# Altium PCB kam_rx.PcbDoc
Units mm, origin at the board's own origin, x right, y up, seen from the top; angles counter-clockwise.
Board outline 152.4 x 101.6 mm, 4 copper layers (Top Layer, int1, int2, Bottom Layer), stack 0.707 mm thick; 77 components, 77 nets, 338 pads, 225 vias.
Unrouted connection lines stored in the file: 1.
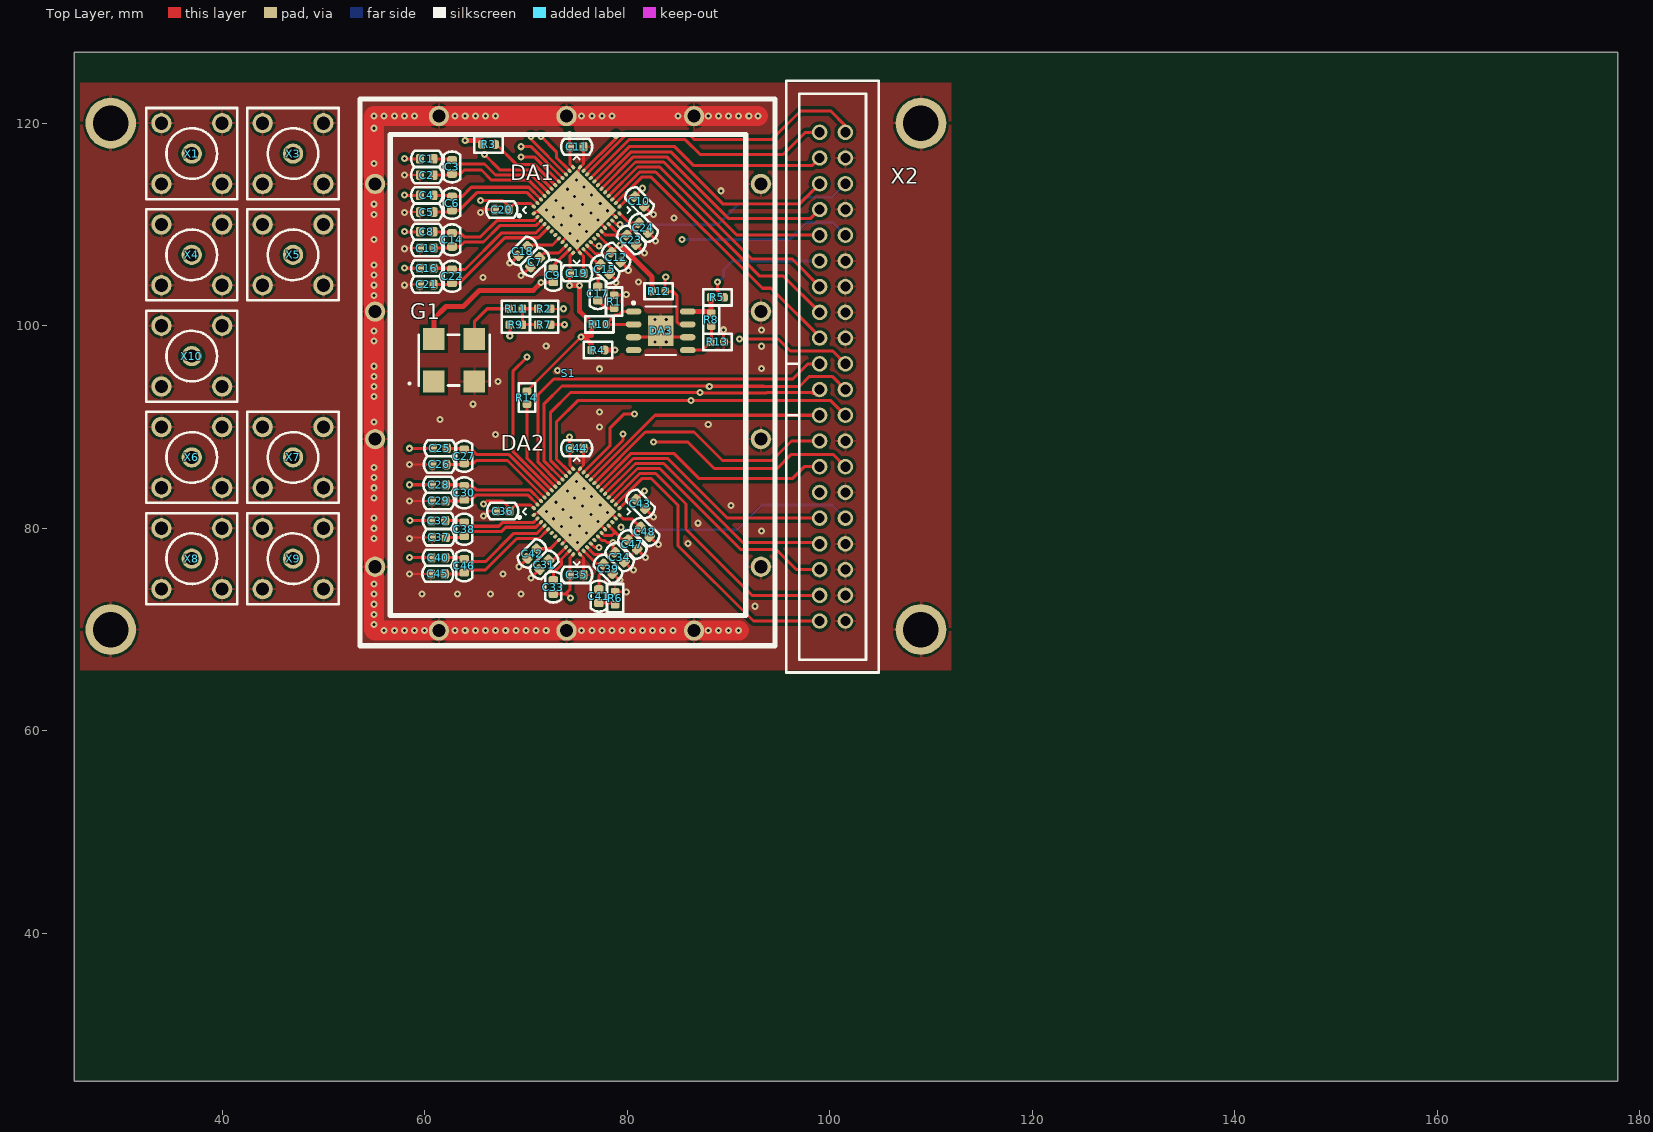
[diagram p0: Top Layer view]
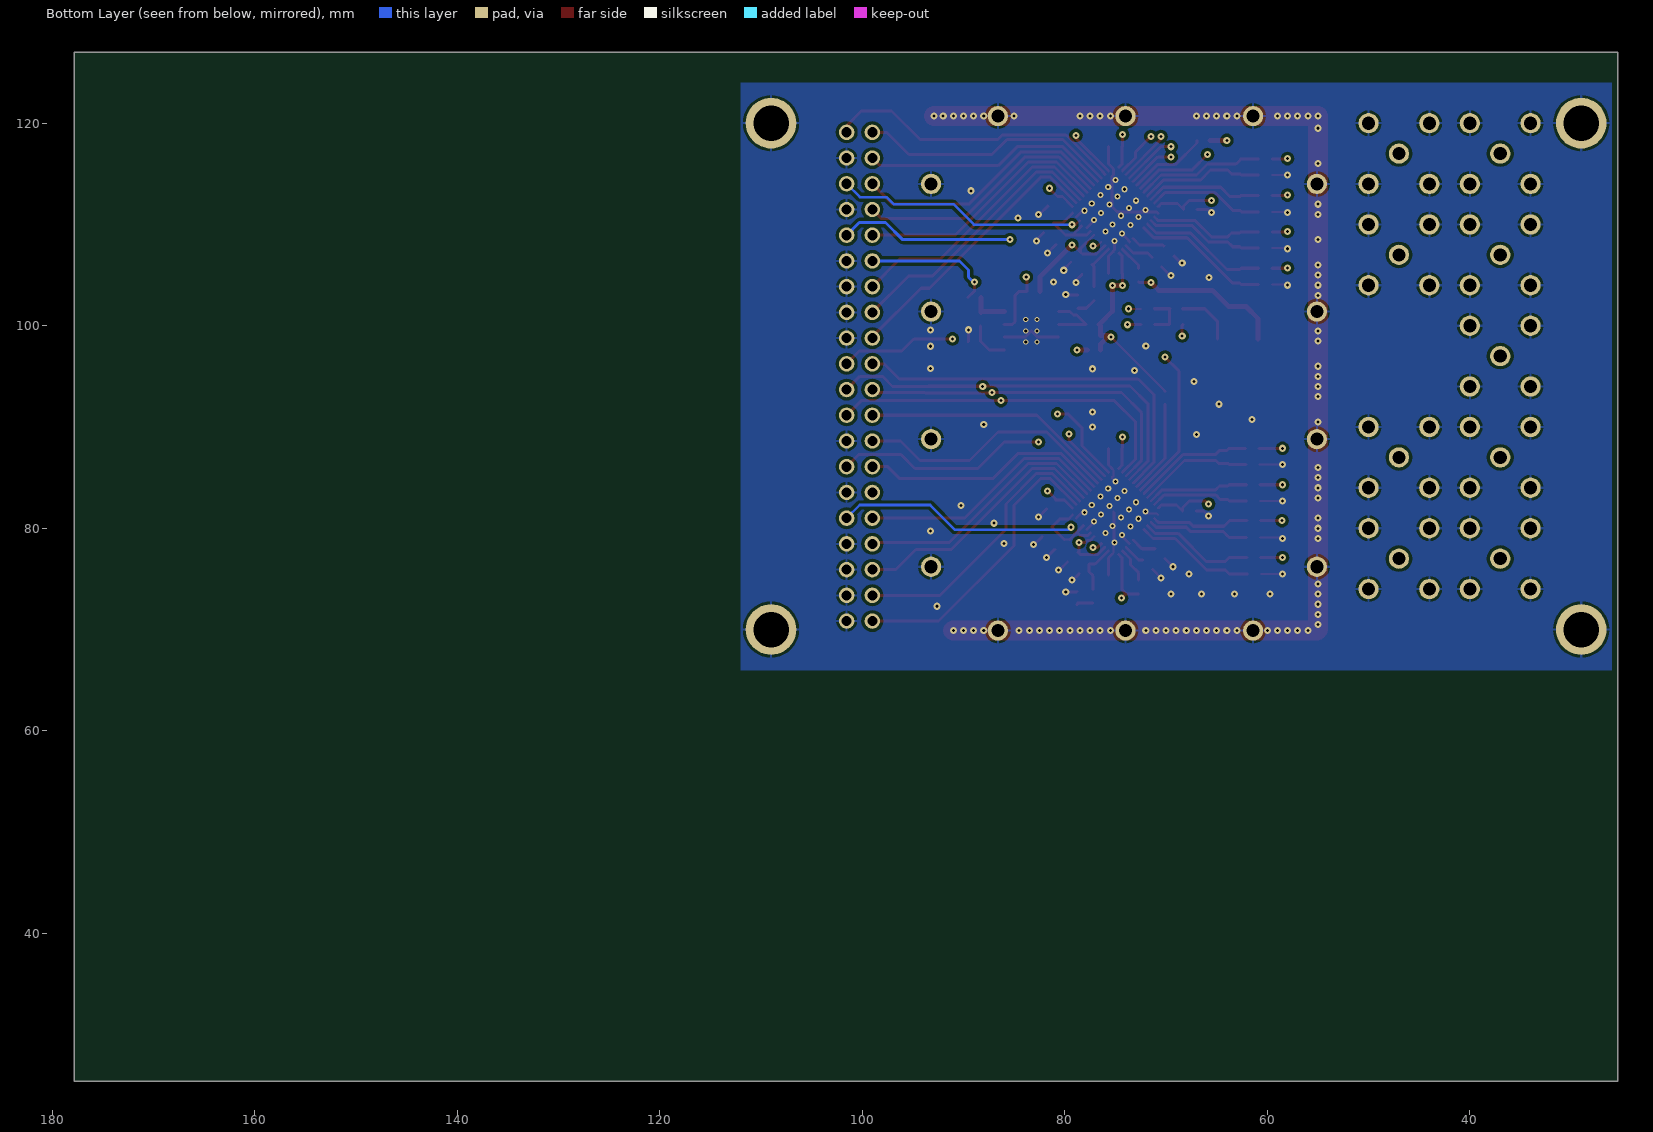
[diagram p1: Bottom Layer view, seen from below]
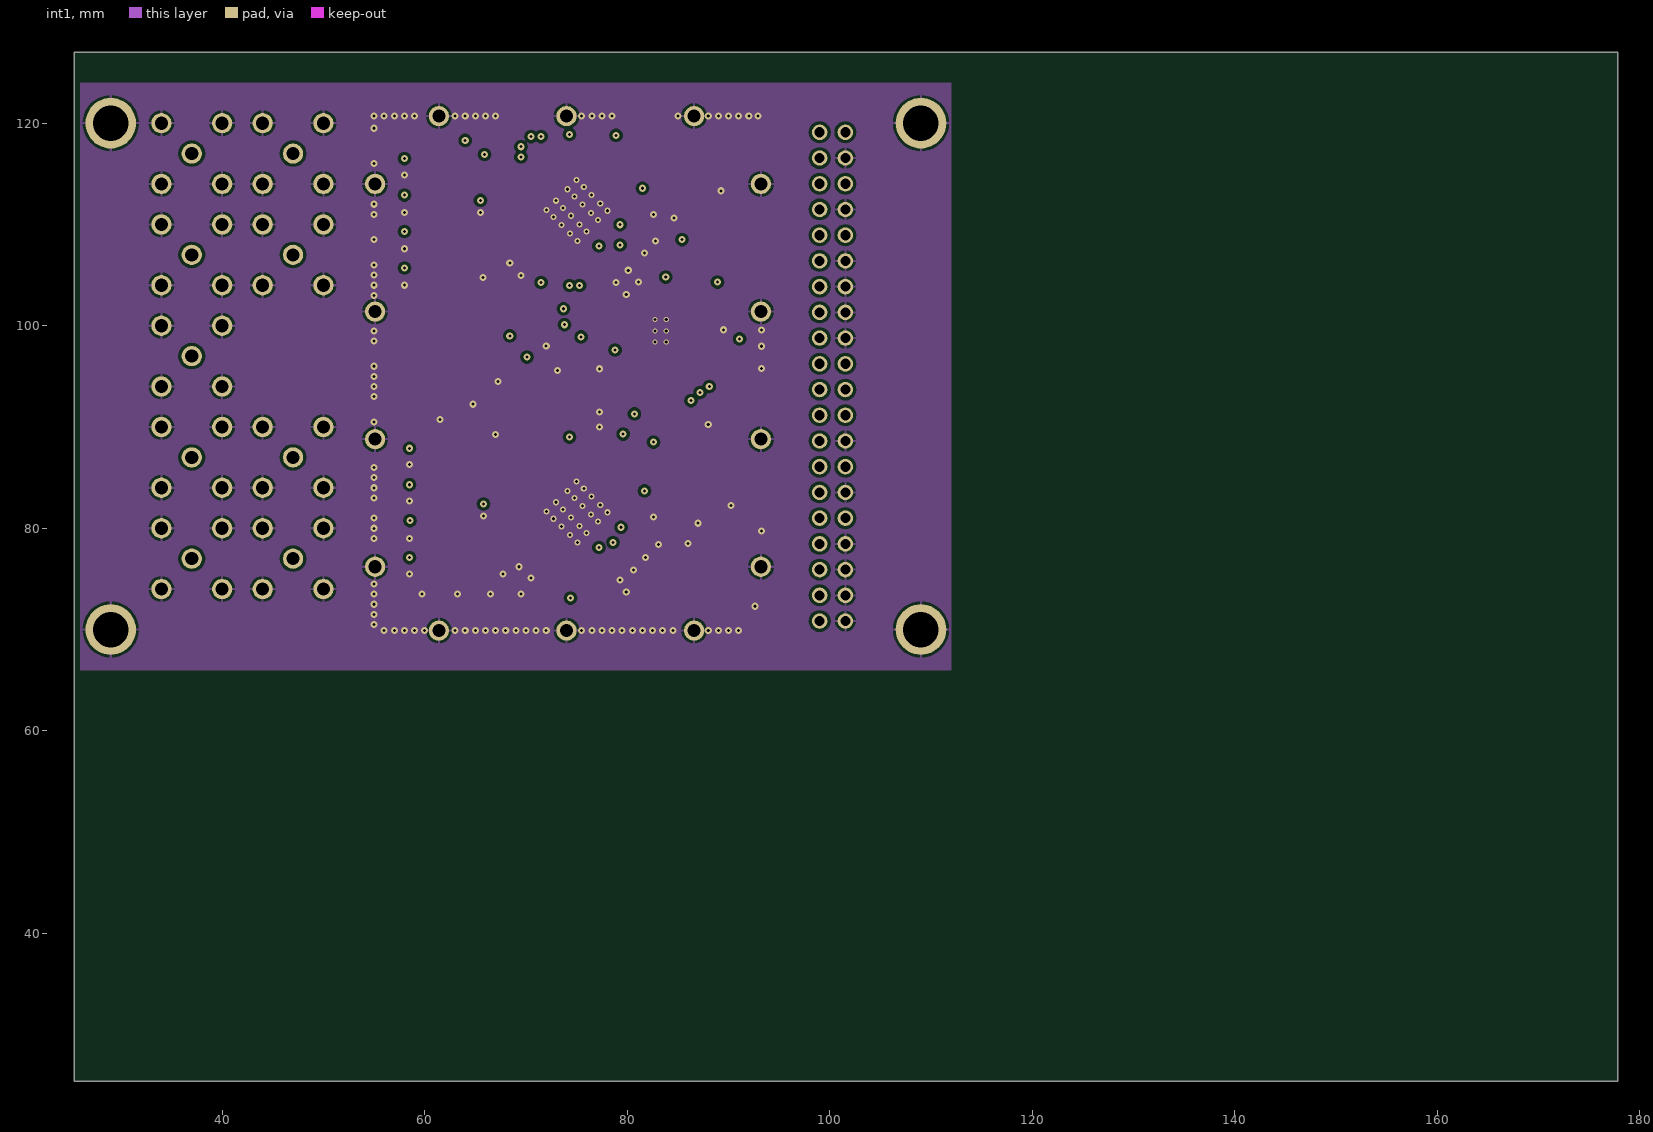
[diagram p2: int1]
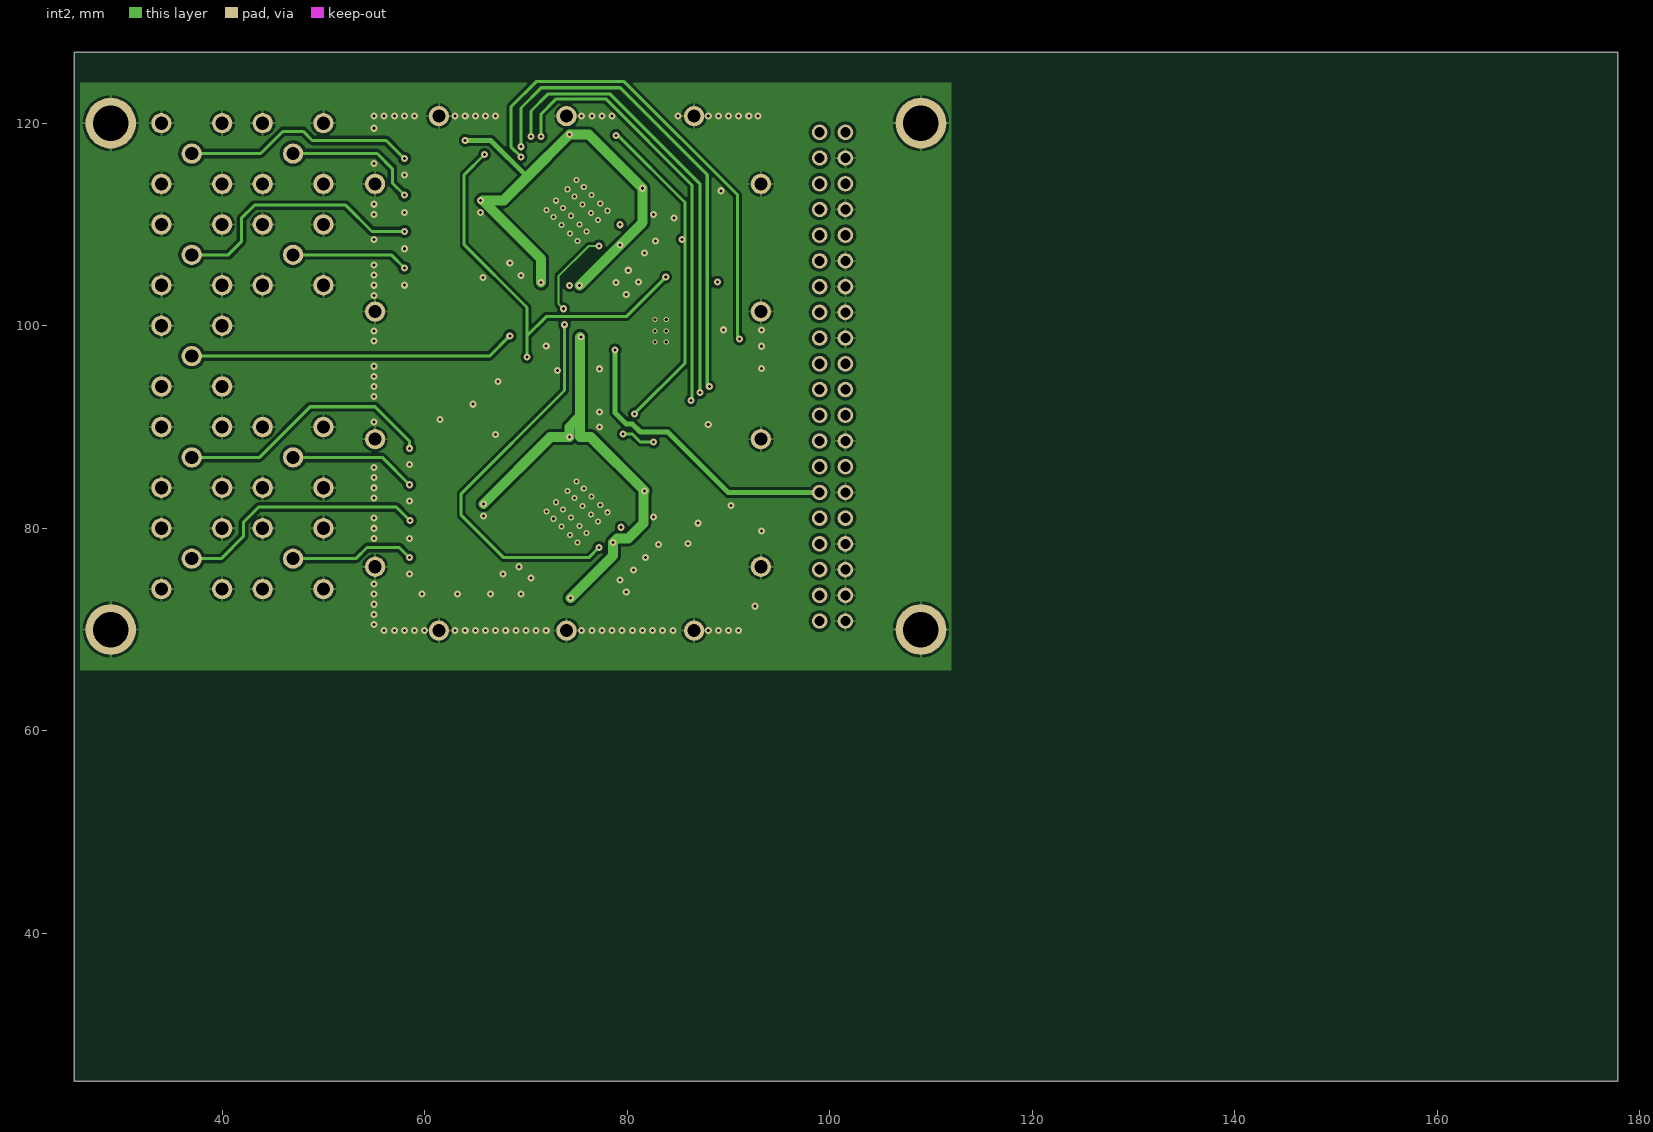
[diagram p3: int2]

## Layer stack, top to bottom
Top Solder: solder mask 0.0102, Solder Resist, Dk 3.5
Top Layer: signal copper 0.018
Dielectric 1: core 0.254, FR-4, Dk 4.2
int1: signal copper 0.018
Dielectric 2: prepreg 0.127, FR-4, Dk 4.2
int2: signal copper 0.018
Dielectric 3: core 0.254, FR-4, Dk 4.2
Bottom Layer: signal copper 0.018
Bottom Solder: solder mask 0.0102, Solder Resist, Dk 3.5

## Board outline
25.4,25.4 177.8,25.4 177.8,127 25.4,127

## Design rules (kind name [scope] priority, off if disabled: settings)
Clearance Clearance_1 [inPolygon] p1: gap=0.3 ignorepadtopadclearanceinfootprint=FALSE except(0: Arc-Hole Track-Hole SMDPad-Hole THPad-Hole Via-Hole Fill-Hole Poly-Hole Region-Hole Text-Hole)
Clearance [All] p2: gap=0.15 ignorepadtopadclearanceinfootprint=FALSE except(0: Arc-Hole Track-Hole SMDPad-Hole THPad-Hole Via-Hole Fill-Hole Poly-Hole Region-Hole Text-Hole)
ComponentClearance [All] p1 off: gap=0 collisioncheckmode=3 verticalgap=0.254 showdistances=FALSE
HoleSize [All] p1: absolutevalues=TRUE maxlimit=2.54 minlimit=0.3 maxpercent=80.000 minpercent=20.000
MinimumSolderMaskSliver [All] p1: minsoldermaskwidth=0.1
PlaneClearance [All] p1: clearance=0.4
PlaneConnect [All] p1: planeconnectstyle=Relief reliefexpansion=0.4 reliefentries=4 reliefconductorwidth=0.2 reliefairgap=0.2
PolygonConnect [isVia] p1: connectstyle=Direct reliefconductorwidth=0.2 reliefentries=4 polygonreliefangle="90 Angle" airgapwidth=0.2
PolygonConnect PolygonConnect_1 [All] p2: connectstyle=Relief reliefconductorwidth=0.254 reliefentries=4 polygonreliefangle="90 Angle" airgapwidth=0.254
RoomDefinition kam_rx [InComponentClass('kam_rx')] p1: confinementstyle=ConfineIn formatcopy=TRUE lockcomponents=FALSE outline 25,65 113,65 113,125 25,125
RoutingVias [All] p1: holewidth=0.3 width=0.7 viastyle="Through Hole" minholewidth=0.3 minwidth=0.7 maxholewidth=2 maxwidth=2.5
SilkToSilkClearance [All] p1: silktosilkclearance=0.1
SilkToSolderMaskClearance [IsPad] p1: minsilkscreentomaskgap=0.2 clearancetoexposedcopper=TRUE
SolderMaskExpansion [All] p1: expansion=0.102 istentingtop=FALSE
Width [All] p1: maxlimit=5 minlimit=0.2 preferedwidth=0.25
23 further rules are at their usual default settings.

## Components (designator, comment, footprint, x,y, rotation, side; value= is the part's Value field where it differs from the comment)
C1 "C0603" CAPC1608X06N 60.2,116.476 r0 top
C2 "C0603" CAPC1608X06N 60.2,114.876 r0 top
C3 "C0603" CAPC1608X06N 62.7,115.676 r90 top
C4 "C0603" CAPC1608X06N 60.2,112.876 r0 top
C5 "C0603" CAPC1608X06N 60.2,111.226 r0 top
C6 "C0603" CAPC1608X06N 62.7,112.076 r90 top
C7 "C0603" CAPC1608X06N 70.9,106.276 r45 top
C8 "C0603" CAPC1608X06N 60.2,109.276 r0 top
C9 "C0603" CAPC1608X06N 72.7,104.976 r90 top
C10 "C0603" CAPC1608X06N 81.2,112.276 r315 top
C11 "C0603" CAPC1608X06N 75,117.676 r0 top
C12 "C0603" CAPC1608X06N 78.9,106.776 r315 top
C13 "C0603" CAPC1608X06N 60.2,107.676 r0 top
C14 "C0603" CAPC1608X06N 62.7,108.476 r90 top
C15 "C0603" CAPC1608X06N 77.8,105.576 r135 top
C16 "C0603" CAPC1608X06N 60.2,105.676 r0 top
C17 "C0603" CAPC1608X06N 77.1,103.176 r90 top
C18 "C0603" CAPC1608X06N 69.7,107.376 r225 top
C19 "C0603" CAPC1608X06N 75,105.176 r0 top
C20 "C0603" CAPC1608X06N 67.6,111.476 r180 top
C21 "C0603" CAPC1608X06N 60.2,104.076 r0 top
C22 "C0603" CAPC1608X06N 62.7,104.876 r90 top
C23 "C0603" CAPC1608X06N 80.4,108.476 r315 top
C24 "C0603" CAPC1608X06N 81.6,109.676 r315 top
C25 "C0603" CAPC1608X06N 61.5,87.9 r0 top
C26 "C0603" CAPC1608X06N 61.45,86.3 r0 top
C27 "C0603" CAPC1608X06N 63.9,87.1 r90 top
C28 "C0603" CAPC1608X06N 61.4,84.3 r0 top
C29 "C0603" CAPC1608X06N 61.375,82.7 r0 top
C30 "C0603" CAPC1608X06N 63.9,83.5 r90 top
C31 "C0603" CAPC1608X06N 71.8,76.4 r45 top
C32 "C0603" CAPC1608X06N 61.35,80.75 r0 top
C33 "C0603" CAPC1608X06N 72.7,74.2 r90 top
C34 "C0603" CAPC1608X06N 79.25,77.15 r315 top
C35 "C0603" CAPC1608X06N 75,75.4 r0 top
C36 "C0603" CAPC1608X06N 67.7,81.7 r180 top
C37 "C0603" CAPC1608X06N 61.4,79.1 r0 top
C38 "C0603" CAPC1608X06N 63.9,79.9 r90 top
C39 "C0603" CAPC1608X06N 78.1,76 r135 top
C40 "C0603" CAPC1608X06N 61.35,77.1 r0 top
C41 "C0603" CAPC1608X06N 77.2,73.3 r90 top
C42 "C0603" CAPC1608X06N 70.6,77.5 r225 top
C43 "C0603" CAPC1608X06N 81.3,82.4 r315 top
C44 "C0603" CAPC1608X06N 75,87.9 r0 top
C45 "C0603" CAPC1608X06N 61.3,75.5 r0 top
C46 "C0603" CAPC1608X06N 63.9,76.3 r90 top
C47 "C0603" CAPC1608X06N 80.5,78.4 r315 top
C48 "C0603" CAPC1608X06N 81.75,79.65 r315 top
DA1 "ADAR7251" PQFN50P700X700X100_HS-49N 75,111.426 r45 top
DA2 "ADAR7251" PQFN50P700X700X100_HS-49N 75,81.65 r45 top
DA3 "ADP7104" SOIC127P600X165_HS-9N 83.3,99.5 r0 top
G1 "GXO7531" DFN400P700X145-4N 62.9,96.6 r0 top
R1 "R0603" RESC1608X06N 78.7,102.376 r90 top
R2 "R0603" RESC1608X06N 71.8,101.676 r180 top
R3 "R0603" RESC1608X06N 66.3,117.9 r0 top
R4 "R0603" RESC1608X06N 77.1,97.6 r180 top
R5 "R0603" RESC1608X06N 88.9,102.8 r180 top
R6 "R0603" RESC1608X06N 78.8,73.1 r90 top
R7 "R0603" RESC1608X06N 71.8,100.1 r180 top
R8 "R0603" RESC1608X06N 88.3,100.6 r270 top
R9 "R0603" RESC1608X06N 69,100.1 r180 top
R10 "R0603" RESC1608X06N 77.245,100.131 r0 top
R11 "R0603" RESC1608X06N 69,101.676 r180 top
R12 "R0603" RESC1608X06N 83.1,103.4 r0 top
R13 "R0603" RESC1608X06N 88.9,98.4 r0 top
R14 "R0603" RESC1608X06N 70.1,92.9 r270 top
S1 "PE003-003NB" PE003-003NB 55.1,69.9 r90 top
X1 "MCX 1085221-1" MCX 37,117 r0 top
X2 "BH40" BH40 99,119.1 r0 top
X3 "MCX 1085221-1" MCX 47,117 r0 top
X4 "MCX 1085221-1" MCX 37,107 r0 top
X5 "MCX 1085221-1" MCX 47,107 r0 top
X6 "MCX 1085221-1" MCX 37,87 r0 top
X7 "MCX 1085221-1" MCX 47,87 r0 top
X8 "MCX 1085221-1" MCX 37,77 r0 top
X9 "MCX 1085221-1" MCX 47,77 r0 top
X10 "MCX 1085221-1" MCX 37,97 r0 top

## Footprints (in the part's own frame and the unit in brackets; to place one, negate y for a bottom-side part, rotate by r counter-clockwise, add the part's x,y. Pads: shape width x height; smd on the part's side, far side on the other; paste and mask are expansions set on the pad)
BH40 [mil]
  round 60 hole 39.37: 1(0,0) 2(100,0) 3(0,-100) 4(100,-100) 5(0,-200) 6(100,-200) 7(0,-300) 8(100,-300) 9(0,-400) 10(100,-400) 11(0,-500) 12(100,-500) 13(0,-600) 14(100,-600) 15(0,-700) 16(100,-700) 17(0,-800) 18(100,-800) 19(0,-900) 20(100,-900) 21(0,-1000) 22(100,-1000) 23(0,-1100) 24(100,-1100) 25(0,-1200) 26(100,-1200) 27(0,-1300) 28(100,-1300) 29(0,-1400) 30(100,-1400) 31(0,-1500) 32(100,-1500) 33(0,-1600) 34(100,-1600) 35(0,-1700) 36(100,-1700) 37(0,-1800) 38(100,-1800) 39(0,-1900) 40(100,-1900)
  silkscreen extent -130,-2100 230,200
CAPC1608X06N [mm] "Chip Capacitor, 2-Leads, Body 1,60x0,81mm, IPC Medium Density"
  rrect50% 0.8x0.95 smd: 1(-0.675,0) 2(0.675,0)
  silkscreen extent -1.53,-0.8 1.53,0.8, body extent -0.82,-0.42 0.82,0.42, height 0.6
DFN400P700X145-4N [mm] "DFN, 4-Leads, Body 5,00x7,00mm, Pitch 4,00mm, IPC Medium Density"
  rect 2.15x2.15 smd: 1(-2,-2.1) 2(2,-2.1) 3(2,2.1) 4(-2,2.1)
  silkscreen extent -4.45,-2.5 3.5,2.5, body extent -3.5,-2.5 3.5,2.5, height 1.45
MCX [mm]
  round 2 hole 1.3: 1(0,0) 2(-3,-3) 2(-3,3) 2(3,-3) 2(3,3)
  silkscreen extent -4.5,-4.5 4.5,4.5
PE003-003NB [mm]
  round 2 hole 1.3: 0(0,-6.3) 0(0,-18.9) 0(0,-31.5) 0(6.3,0) 0(6.3,-38.1) 0(18.9,0) 0(18.9,-38.1) 0(31.5,-38.1) 0(31.5,0) 0(44.1,-38.1) 0(44.1,0) 0(50.8,-31.5) 0(50.8,-18.9) 0(50.8,-6.3)
  silkscreen extent -1.5,-39.5 52.5,1.5
PQFN50P700X700X100_HS-49N [mm] "PQFN, 48-Leads, Body 7,00x7,00mm, Pitch 0,50mm, Thermal Pad 4,00x5,60mm, IPC Medium Density"
  oval 0.45x0.35 smd: 0(-3.225,2.75) 1(-3.225,2.25) 2(-3.225,1.75) 3(-3.225,1.25) 4(-3.225,0.75) 5(-3.225,0.25) 6(-3.225,-0.25) 7(-3.225,-0.75) 8(-3.225,-1.25) 9(-3.225,-1.75) 10(-3.225,-2.25) 11(-3.225,-2.75) 24(3.225,-2.75) 25(3.225,-2.25) 26(3.225,-1.75) 27(3.225,-1.25) 28(3.225,-0.75) 29(3.225,-0.25) 30(3.225,0.25) 31(3.225,0.75) 32(3.225,1.25) 33(3.225,1.75) 34(3.225,2.25) 35(3.225,2.75)
  oval 0.35x0.45 smd: 12(-2.75,-3.225) 13(-2.25,-3.225) 14(-1.75,-3.225) 15(-1.25,-3.225) 16(-0.75,-3.225) 17(-0.25,-3.225) 18(0.25,-3.225) 19(0.75,-3.225) 20(1.25,-3.225) 21(1.75,-3.225) 22(2.25,-3.225) 23(2.75,-3.225) 36(2.75,3.225) 37(2.25,3.225) 38(1.75,3.225) 39(1.25,3.225) 40(0.75,3.225) 41(0.25,3.225) 42(-0.25,3.225) 43(-0.75,3.225) 44(-1.25,3.225) 45(-1.75,3.225) 46(-2.25,3.225) 47(-2.75,3.225)
  rect 5.6x5.6 smd: 48(0,0)
  silkscreen extent -4.52,-3.75 3.75,3.75, body extent -3.55,-3.55 3.55,3.55, height 1
RESC1608X06N [mm] "Chip Resistor, 2-Leads, Body 1,60x0,81mm, IPC Medium Density"
  rrect50% 0.75x0.85 smd: 1(-0.65,0) 2(0.65,0)
  silkscreen extent -1.4,-0.8 1.4,0.8, body extent -0.83,-0.42 0.82,0.42, height 0.6
SOIC127P600X165_HS-9N [mm] "SOIC, 8-Leads, Body 4,90x3,90mm, Pitch 1,27mm, Thermal Pad 3,00x2,50mm, IPC Medium Density"
  oval 1.55x0.6 smd: 1(-2.675,1.905) 2(-2.675,0.635) 3(-2.675,-0.635) 3(2.675,-0.635) 5(2.675,-1.905) 7(2.675,0.635) 8(2.675,1.905) ""(-2.675,-1.905)
  rect 2.5x3 smd: 3(0,0)
  silkscreen extent -2.8,-2.4 1.5,2.88, body extent -1.9,-2.4 1.9,2.4, height 1.65

## Free pads (board coordinates)
  round 5 hole 3.5: 2(29,70) 2(29,120) 2(109,70) 2(109,120)

## Via types
v1: diameter 0.7, hole 0.3, Top Layer to Bottom Layer, 179 vias
v2: diameter 0.6, hole 0.3, Top Layer to Bottom Layer, 40 vias
v3: diameter 0.5, hole 0.3, Top Layer to Bottom Layer, 6 vias

## Nets (pads, with @x,y where several pads share a name; then routed paths per layer and width w, separated by ;. In a path a pad name is that pad's centre, name@x,y a point inside that pad or via, vN(x,y) a via of type N, cw(c..) or ccw(c..) an arc to the next point about the centre after c; other vN are vias at no path point)
3VIN: R4.1 X2.29 | length 30.7
  Top Layer w0.5: R4.1 v1(78.8,97.6)
  int2 w0.5: v1(78.8,97.6) 78.8,91.4 79.9,90.3 80.5,90.3 81.3,89.5 84,89.5 89.96,83.54 X2.29
5VIN: R5.1 X2.11 | length 13.1
  Top Layer w0.3: v1(88.9,104.3) 88.9,103.45 R5.1
  Bottom Layer w0.3: v1(88.9,104.3) 89,104.3 89.5,104.8 89.5,105.5 90.4,106.4 X2.11
CONV_START: DA1.34 DA2.34 X2.10 | length 63.5
  Top Layer w0.3: DA2.34 78.284,88.116 78.284,89.884 79.7,91.3 v1(80.7,91.3) ; DA1.34 78.9,118.508 v1(78.9,118.8)
  int2 w0.3: v1(78.9,118.8) 79.076,118.8 85.7,112.176 ; v1(80.7,91.3) 85.7,96.3 v1@85.7,108.5 ; v1(85.4,108.5) v1@85.7,108.5 ; 85.7,112.2 85.7,112.176 ; v1@85.7,108.5 85.7,112.176
  Bottom Layer w0.3: v1(85.4,108.5) 96,108.5 97.7,110.2 100.28,110.2 X2.10
DREADY1: DA1.21 X2.6 | length 24.9
  Top Layer w0.25: DA1.21 78.925,109.976 v1(79.3,109.976)
  Bottom Layer w0.25: v1(79.3,109.976) 88.976,109.976 91,112 96.9,112 97.6,112.7 100.22,112.7 X2.6
DREADY2: DA2.21 X2.32 | length 23.8
  Bottom Layer w0.25: v1(79.4,80.1) 79.625,79.875 90.875,79.875 93.3,82.3 100.24,82.3 X2.32
GND: C2.1 C5.1 C7.1 C10.2 C11.2 C12.2 C13.1 C15.1 C18.2 C19.2 C20.2 C21.1 C23.2 C24.2 C26.1 C29.1 C31.1 C34.2 C35.2 C36.2 C37.1 C39.1 C42.2 C43.2 C44.2 C45.1 C47.2 C48.2 DA1.0 DA1.8 DA1.12 DA1.19 DA1.22 DA1.35 DA1.48 DA2.0 DA2.8 DA2.12 DA2.19 DA2.22 DA2.35 DA2.48 DA3.3 G1.2 pad.2 R1.2 R6.2 R13.2 S1.0 X1.2 X2.4 X2.8 X2.12 X2.14 X2.16 X2.18 X2.26 X2.30 X2.34 X2.36 X2.38 X2.40 X3.2 X4.2 X5.2 X6.2 X7.2 X8.2 X9.2 X10.2 | length 203.8
  Top Layer w0.2: v1(58,104) 58.076,104.076 C21.1 ; v1(58,107.6) 58.076,107.676 C13.1 ; v1(58,111.2) 58.026,111.226 C5.1 ; v1(58,114.9) 58.024,114.876 C2.1 ; v1(58.5,75.5) C45.1 ; v1(58.5,79) 58.6,79.1 C37.1 ; v1(58.5,82.7) C29.1 ; v1(58.5,86.3) C26.1 ; DA2.0 70.936,81.476 DA2.48@71.856,81.476 ; DA2.48@74.364,79.246 v2(74.364,79.317) ; v2(75,84.62) 75.336,84.956 75.336,85.133 75.179,85.133 75.179,85.718 DA2.35 ; v2(75.071,78.609) 75.071,81.546 75.174,81.65 75.174,77.586 DA2.12 ; DA2.48@77.121,80.589 v2(77.121,80.66) ; v2(78.041,81.579) DA2.48@78.288,81.579 ; DA2.22@78.836,81.031 78.836,80.961 DA2.22
  Top Layer w0.3: v1(65.5,111.176) 65.8,111.476 C20.2 ; v1(65.8,81.2) 66.3,81.7 C36.2 ; v1(68.4,106.176) 68.5,106.176 C18.2 ; v1(69.3,76.2) C42.2 ; v1(69.5,104.976) 69.6,104.976 C7.1 ; v1(70.5,75.1) C31.1 ; DA1.0 70.936,111.251 74.826,111.251 DA1.48 75.336,111.761 75.336,114.751 75.179,114.908 75.179,115.494 DA1.35 75.675,115.99 C11.2 ; DA2.8 DA2.48@74.364,79.246 ; DA1.8 73.603,108.297 73.76,108.453 73.76,108.489 v2(74.364,109.092) ; v2(75.071,108.385) 75.071,107.536 75.174,107.433 75.174,107.362 DA1.12 75.675,106.861 C19.2 ; DA2.35@75.318,85.893 75.675,86.249 C44.2 ; DA2.12 75.675,77.086 C35.2 ; DA2.48@77.121,80.589 DA2.19 ; v2(77.121,110.436) 77.121,110.365 DA1.19 ; v2(78.041,111.355) 78.253,111.355 DA1.22 ; C15.1 78.9,104.476 v1(78.9,104.276) ; DA2.48@78.288,81.579 DA2.22@78.836,81.031 ; C39.1 79.2,74.9 v1(79.3,74.9) ; R1.2 79.85,103.026 v1(79.9,103.076) ; R6.2 78.85,73.7 v1(79.9,73.7) ; C12.2 80.1,105.576 v1(80.1,105.476) ; C34.2 80.5,75.9 v1(80.6,75.9) ; DA3.3@80.625,98.865 82.665,98.865 83.3,99.5 83.935,98.865 DA3.3@85.975,98.865 ; C23.2 v1(81.7,107.176) ; C47.2 v1(81.8,77.1) ; C10.2 82.5,110.976 v1(82.6,110.976) ; C43.2 v1(82.6,81.1) ; C24.2 82.8,108.476 v1(82.8,108.376) ; C48.2 83,78.4 v1(83.1,78.4) ; v1(89.5,99.6) 89.5,98.45 R13.2
  Top Layer w2: v1(91,69.9) 86.5,69.9 73.9,69.9 61.3,69.9 55.1,69.9 55,70 55,76.2 55,88.8 55,101.4 55,114 v1(55,120.7) 61.3,120.7 73.9,120.7 v1(92.9,120.7)
  other v1: 56,69.9 57,69.9 58,69.9 59,69.9 60,69.9 63,69.9 64,69.9 65,69.9 66,69.9 67,69.9 68,69.9 69,69.9 70,69.9 71,69.9 72,69.9 75.5,69.9 76.5,69.9 77.5,69.9 78.5,69.9 79.5,69.9 80.5,69.9 81.5,69.9 82.5,69.9 83.5,69.9 84.5,69.9 88,69.9 89,69.9 90,69.9 55,70.5 55,71.5 92.6,72.3 55,72.5 55,73.5 59.75,73.5 63.25,73.5 66.5,73.5 69.5,73.5 55,74.5 67.75,75.5 86,78.5 55,79 93.25,79.75 55,80 87,80.5 55,81 90.25,82.25 55,83 55,84 55,85 55,86 67,89.25 77.25,90 88,90.25 55,90.5 61.5,90.75 77.25,91.5 64.75,92.25 55,93 55,94 67.25,94.5 55,95 73.1,95.575 77.25,95.75 93.275,95.775 55,96 93.275,97.975 72,98 55,98.5 55,99.5 93.25,99.575 55,103 55,104 81.1,104.325 65.75,104.75 55,105 55,106 55,108.5 84.6,110.65 55,111 55,112 89.275,113.325 55,116 55,119.5 56,120.7 57,120.7 58,120.7 59,120.7 63,120.7 64,120.7 65,120.7 66,120.7 67,120.7 75.5,120.7 76.5,120.7 77.5,120.7 78.5,120.7 85,120.7 88,120.7 89,120.7 90,120.7 91,120.7 92,120.7
  other v2: 75.99,79.529 73.515,80.165 75.283,80.236 72.737,80.943 74.434,81.084 76.414,81.367 72.03,81.65 73.656,81.862 75.566,82.216 77.333,82.286 72.949,82.569 74.788,82.994 76.485,83.135 74.081,83.701 75.707,83.913 75.99,109.304 73.515,109.941 75.283,110.011 72.737,110.718 74.434,110.86 76.414,111.143 72.03,111.426 73.656,111.638 75.566,111.991 77.333,112.062 72.949,112.345 74.788,112.769 76.485,112.91 74.081,113.476 75.707,113.688 75,114.395
  other v3: 82.75,98.4 83.85,98.4 82.75,99.5 83.85,99.5 82.75,100.6 83.85,100.6
NetC1_1: C1.1 X1.1 | length 24.6
  Top Layer w0.3: v1(58,116.5) 58.024,116.476 C1.1
  int2 w0.3: X1.1 43.8,117 46,119.2 48,119.2 48.9,118.3 56.2,118.3 v1(58,116.5)
NetC1_2: C1.2 C3.2 DA1.43 | length 12.7
  Top Layer w0.3: C1.2 62.575,116.476 C3.2 63.075,115.976 65.9,115.976 67,114.876 70.489,114.876 DA1.43
NetC2_2: C2.2 C3.1 DA1.44 | length 12.2
  Top Layer w0.3: C2.2 62.575,114.876 C3.1 63.525,115.001 63.9,115.376 65.6,115.376 66.6,114.376 70.282,114.376 DA1.44
NetC4_1: C4.1 X3.1 | length 15.1
  Top Layer w0.3: v1(58,112.9) 58.024,112.876 C4.1
  int2 w0.3: X3.1 55.3,117 56.8,115.5 56.8,114.1 v1(58,112.9)
NetC4_2: C4.2 C6.2 DA1.45 | length 11.5
  Top Layer w0.3: C4.2 62.575,112.876 C6.2 63.675,112.751 64.6,113.676 70.275,113.676 DA1.45
NetC5_2: C5.2 C6.1 DA1.46 | length 11.5
  Top Layer w0.3: C5.2 62.525,111.226 C6.1 63.425,111.401 65.2,113.176 70.068,113.176 DA1.46
NetC7_2: C7.2 DA1.9 | length 3.1
  Top Layer w0.3: C7.2 71.8,107.176 73.225,107.176 DA1.9
NetC8_1: C8.1 X4.1 | length 27
  Top Layer w0.3: v1(58,109.3) 58.024,109.276 C8.1
  int2 w0.3: X4.1 40.6,107 41.9,108.3 41.9,110.6 43.2,111.9 52.2,111.9 54.8,109.3 v1(58,109.3)
NetC8_2: C8.2 C14.2 DA1.1 | length 11.3
  Top Layer w0.3: C8.2 62.575,109.276 C14.2 63.525,109.151 63.9,108.776 65.5,108.776 67.1,110.376 70.768,110.376 DA1.1
NetC9_2: C9.2 DA1.10 | length 2.6
  Top Layer w0.3: C9.2 72.7,105.944 DA1.10
NetC13_2: C13.2 C14.1 DA1.2 | length 11.7
  Top Layer w0.3: C13.2 62.575,107.676 C14.1 63.425,107.801 63.9,108.276 65.8,108.276 67.4,109.876 70.975,109.876 DA1.2
NetC15_2: C15.2 C17.2 DA1.13 | length 4.5
  Top Layer w0.3: DA1.13 77.191,106.053 C15.2 77.1,105.83 C17.2
NetC16_1: C16.1 X5.1 | length 13.1
  Top Layer w0.3: v1(58,105.7) 58.024,105.676 C16.1
  int2 w0.3: X5.1 56.7,107 v1(58,105.7)
NetC16_2: C16.2 C22.2 DA1.3 | length 12.9
  Top Layer w0.3: C16.2 62.575,105.676 C22.2 63.975,105.551 67.6,109.176 70.982,109.176 DA1.3
NetC17_1: C17.1 R1.1 | length 1.9
  Top Layer w0.3: C17.1 77.875,101.726 R1.1
NetC18_1: C18.1 DA1.7 | length 3.4
  Top Layer w0.3: C18.1 70.3,107.976 72.611,107.976 DA1.7
NetC21_2: C21.2 C22.1 DA1.4 | length 13.6
  Top Layer w0.3: C21.2 62.575,104.076 C22.1 63.425,104.201 67.913,108.689 71.203,108.689 DA1.4
NetC23_1: C23.1 C24.1 DA1.18 DA1.20 DA1.23 | length 7.8
  Top Layer w0.3: DA1.18 77.826,108.953 79.24,108.953 ; 78.371,109.822 79.24,108.953 ; DA1.23@79.243,111.107 80.197,110.153 C24.1 C23.1 79.24,108.953
NetC25_1: C25.1 X6.1 | length 28
  Top Layer w0.3: v1(58.5,87.9) C25.1
  int2 w0.3: X6.1 43.7,87 48.7,92 55.1,92 58.5,88.6 v1(58.5,87.9)
NetC25_2: C25.2 C27.2 DA2.43 | length 11.9
  Top Layer w0.3: C25.2 63.775,87.9 C27.2 63.975,87.7 64.7,87.7 65.1,87.3 68.289,87.3 DA2.43
NetC26_2: C26.2 C27.1 DA2.44 | length 11.4
  Top Layer w0.3: C26.2 63.775,86.3 C27.1 63.925,86.4 64.8,86.4 65.1,86.7 68.182,86.7 DA2.44
NetC28_1: C28.1 X7.1 | length 14.8
  Top Layer w0.3: v1(58.5,84.3) C28.1
  int2 w0.3: X7.1 55.8,87 v1(58.5,84.3)
NetC28_2: C28.2 C30.2 DA2.45 | length 10.1
  Top Layer w0.3: C28.2 63.775,84.3 C30.2 64.725,84.175 65.1,83.8 70.375,83.8 DA2.45
NetC29_2: C29.2 C30.1 DA2.46 | length 9.7
  Top Layer w0.3: C29.2 63.775,82.7 C30.1 64.625,82.825 65.1,83.3 70.168,83.3 DA2.46
NetC31_2: C31.2 DA2.9 | length 2.2
  Top Layer w0.3: C31.2 72.702,76.877 DA2.9
NetC32_1: C32.1 X8.1 | length 27.2
  Top Layer w0.3: v1@58.5,80.7 v1(58.55,80.75) C32.1
  int2 w0.3: X8.1 39.9,77 42.1,79.2 42.1,80.6 43.6,82.1 57.2,82.1 v1(58.55,80.75)
NetC32_2: C32.2 C38.2 DA2.1 | length 9.6
  Top Layer w0.3: C32.2 63.725,80.75 C38.2 64.275,80.2 67.3,80.2 67.65,80.55 70.718,80.55 DA2.1
NetC33_2: C33.2 DA2.10 | length 3.6
  Top Layer w0.3: C33.2 72.7,75.6 73.5,76.4 73.5,76.968 DA2.10
NetC37_2: C37.2 C38.1 DA2.2 | length 10
  Top Layer w0.3: C37.2 63.775,79.1 C38.1 64.375,79.7 67.6,79.7 68,80.1 70.975,80.1 DA2.2
NetC39_2: C39.2 C41.2 DA2.13 | length 5.1
  Top Layer w0.3: DA2.13 76.991,76.477 C39.2 77.623,75.723 77.2,75.3 C41.2
NetC40_1: C40.1 X9.1 | length 14.5
  Top Layer w0.3: v1(58.5,77.1) C40.1
  int2 w0.3: X9.1 53.2,77 54.3,78.1 57.5,78.1 v1(58.5,77.1)
NetC40_2: C40.2 C46.2 DA2.3 | length 11.4
  Top Layer w0.3: C40.2 63.775,77.1 C46.2 64.175,76.7 66,76.7 68.8,79.5 71.082,79.5 DA2.3
NetC41_1: C41.1 R6.1 | length 1.7
  Top Layer w0.3: C41.1 78.625,72.625 R6.1 ; R6.1@78.725,72.625 R6.1@78.75,72.6
NetC42_1: C42.1 DA2.7 | length 2.5
  Top Layer w0.3: C42.1 72.388,77.977 DA2.7
NetC45_2: C45.2 C46.1 DA2.4 | length 12
  Top Layer w0.3: C45.2 63.775,75.5 C46.1 64.175,75.9 66,75.9 69.1,79 71.289,79 DA2.4
NetDA1_15: DA1.15 R2.1 | length 10.9
  Top Layer w0.2: R2.1 v1(73.7,101.676) ; DA1.15 76.782,107.876 v1(77.2,107.876)
  int2 w0.2: v1(73.7,101.676) 73.2,102.176 73.2,104.876 76.2,107.876 v1(77.2,107.876)
NetDA1_25: DA1.25 X2.17 | length 27.8
  Top Layer w0.3: DA1.25 81.432,114.676 82.38,114.676 93.356,103.7 94.2,103.7 99,98.9 X2.17
NetDA1_26: DA1.26 X2.15 | length 27.3
  Top Layer w0.3: DA1.26 81.225,115.176 82.8,115.176 93.076,104.9 95.42,104.9 X2.15
NetDA1_27: DA1.27 X2.13 | length 26.9
  Top Layer w0.3: DA1.27 81.018,115.676 83.2,115.676 92.276,106.6 96.26,106.6 X2.13
NetDA1_28: DA1.28 X2.9 | length 25.4
  Top Layer w0.3: DA1.28 80.811,116.176 83.6,116.176 90.836,108.94 X2.9
NetDA1_29: DA1.29 X2.7 | length 25.7
  Top Layer w0.3: DA1.29 80.604,116.676 83.9,116.676 89.976,110.6 98.12,110.6 X2.7
NetDA1_30: DA1.30 X2.5 | length 26.3
  Top Layer w0.3: DA1.30 80.396,117.176 84.3,117.176 89.476,112 96.98,112 X2.5 X2.5@99,114
NetDA1_31: DA1.31 X2.3 | length 24.8
  Top Layer w0.3: DA1.31 80.189,117.676 84.7,117.676 86.576,115.8 98.24,115.8 X2.3
NetDA1_32: DA1.32 X2.1 | length 25.7
  Top Layer w0.3: DA1.32 80.182,118.376 85.724,118.376 87.2,116.9 95.4,116.9 97.6,119.1 X2.1
NetDA1_41: DA1.41 R3.2 | length 7.9
  Top Layer w0.3: R3.2@66.95,118.3 66.95,118.05 69.1,115.9 70.879,115.9 DA1.41
NetDA2_15: DA2.15 R7.1 | length 41.1
  Top Layer w0.3: R7.1 73.15,100.1 v1(73.8,100.1) ; DA2.15 76.782,78.1 v1(77.2,78.1)
  int2 w0.3: v1(73.8,100.1) 73.8,93.6 63.6,83.4 63.6,81.3 67.8,77.1 76.2,77.1 v1(77.2,78.1)
NetDA2_25: DA2.25 X2.39 | length 29.4
  Top Layer w0.3: DA2.25 81.432,84.9 82.4,84.9 85,82.3 85,78.3 92.46,70.84 X2.39
NetDA2_26: DA2.26 X2.37 | length 28
  Top Layer w0.3: DA2.26 81.225,85.4 82.8,85.4 85.8,82.4 85.8,79.9 92.32,73.38 X2.37
NetDA2_27: DA2.27 X2.35 | length 26.2
  Top Layer w0.3: DA2.27 81.018,85.9 83.2,85.9 91.2,77.9 94.7,77.9 96.68,75.92 X2.35
NetDA2_28: DA2.28 X2.33 | length 25.7
  Top Layer w0.3: DA2.28 80.811,86.4 83.6,86.4 91.4,78.6 98.86,78.6 X2.33
NetDA2_29: DA2.29 X2.31 | length 25.3
  Top Layer w0.3: DA2.29 80.604,86.9 84,86.9 89.9,81 X2.31
NetDA2_30: DA2.30 X2.27 | length 24.8
  Top Layer w0.3: DA2.30 80.396,87.4 84.6,87.4 87.1,84.9 96.3,84.9 97.48,86.08 X2.27
NetDA2_31: DA2.31 X2.25 | length 26.3
  Top Layer w0.3: DA2.31 81.789,89.5 86.6,89.5 89.4,86.7 94.3,86.7 96.22,88.62 X2.25
NetDA2_32: DA2.32 X2.23 | length 25.2
  Top Layer w0.3: DA2.32 82.742,91.16 X2.23
NetDA2_41: DA2.41 R14.2 | length 9.3
  Top Layer w0.3: R14.2 70.1,86.904 DA2.41
NetDA3_1: DA3.1 DA3.2 R10.2 | length 6
  Top Layer w0.3: R10.2 R10.2@77.899,100.135 ; DA3.2 R10.2@77.899,100.135 ; DA3.1 79.494,101.405 79.139,101.051 78.814,101.051 R10.2@77.899,100.135
NetDA3_5: DA3.5 R8.2 R13.1 | length 4.2
  Top Layer w0.3: DA3.5 87.445,97.595 R13.1 88.3,98.45 R8.2
NetDA3_8: DA3.8 R5.2 R8.1 | length 3.9
  Top Layer w0.3: R8.1@88.145,101.405 88.25,101.3 R8.1
  Top Layer w0.5: DA3.8 R8.1@88.145,101.405 ; R8.1@88.25,101.3 R5.2
NetG1_3: G1.3 R11.2 | length 5.7
  Top Layer w0.3: G1.3 64.9,100.4 66.176,101.676 R11.2
NetR2_2: R2.2 R7.2 R9.1 R11.1 | length 4.6
  Top Layer w0.3: R11.1@69.6,101.676 R11.1@69.65,101.626 ; R7.2 70.45,100.1 R9.1 R11.1 R2.2
NetR9_2: R9.2 X10.1 | length 33.3
  Top Layer w0.3: R9.2 68.4,100.05 v1(68.4,99)
  int2 w0.3: X10.1 66.4,97 v1(68.4,99)
PWDN: DA1.42 DA2.42 DA3.7 R12.2 | length 69.4
  Top Layer w0.3: v1(65.9,116.9) 67.4,115.4 70.672,115.4 DA1.42 ; v1(70.1,96.9) 68.7,95.5 68.7,87.596 DA2.42 ; v1(83.8,104.8) 83.75,104.75 R12.2 84.5,103.4 84.9,103 84.9,102.4 84.9,100.4 85.165,100.135 DA3.7
  int2 w0.3: v1(65.9,116.9) 63.9,114.9 63.9,108 70.1,101.8 70.1,99 ; v1(70.1,96.9) 70.1,99 ; v1(83.8,104.8) 79.9,100.9 72,100.9 70.1,99
SCLK_ADC1: DA1.33 X2.2 | length 29.8
  Top Layer w0.3: DA1.33 76.078,114.943 76.078,115.014 76.2,115.136 76.2,115.171 79.854,118.826 86.174,118.826 86.6,118.4 94.3,118.4 97.1,121.2 100.1,121.2 101.54,119.76 X2.2
SCLK_ADC2: DA2.33 X2.28 | length 30
  Top Layer w0.3: DA2.33 79.575,88.7 v1@79.575,89.275 ; v1(82.6,88.5) 86,88.5 88.6,85.9 94.8,85.9 96.2,87.3 100.32,87.3 X2.28
  int2 w0.3: v1(79.6,89.3) 80.5,89.3 81.3,88.5 v1(82.6,88.5)
SPI_CS1: DA1.40 X2.20 | length 63.9
  Top Layer w0.3: v1(69.5,116.676) 70.811,116.676 DA1.40 ; v1(91.1,98.7) 94.9,98.7 96.1,97.5 100.28,97.5 X2.20
  int2 w0.3: v1(69.5,116.676) 68.5,117.676 68.5,121.6 71,124.1 79.7,124.1 90.9,112.9 90.9,98.9 v1(91.1,98.7)
SPI_CS2: DA2.40 X2.19 | length 38.6
  Top Layer w0.3: DA2.40 71.2,86.511 71.2,93.2 72.75,94.75 89.75,94.75 96.35,94.75 97.84,96.24 X2.19
SPI_MISO: DA1.37 DA2.37 X2.24 | length 82.7
  Top Layer w0.3: v1(71.5,118.676) 73,117.176 73,116.608 DA1.37 ; DA2.37 73,86.832 73,90.5 75.1,92.6 v1(86.3,92.6) 100.1,92.6 X2.24
  int2 w0.3: v1(71.5,118.676) 71.5,120.9 73,122.4 77.876,122.4 86.4,113.876 ; v1(86.3,92.6) 86.4,92.7 86.4,113.9
SPI_MOSI: DA1.38 DA2.38 X2.21 | length 84
  Top Layer w0.3: v1(70.5,118.676) 70.5,118.4 DA1.38 ; DA2.38 72.4,86.725 72.4,91.4 74.4,93.4 v1(87.2,93.4) 87.25,93.35 93.769,93.35 93.819,93.4 98.2,93.4 98.3,93.3 98.4,93.4 98.55,93.25 X2.21
  int2 w0.3: v1(70.5,118.676) 70.5,121.2 72.2,122.9 78.276,122.9 87.2,113.976 v1(87.2,93.4)
SPI_SCK: DA1.39 DA2.39 X2.22 | length 98.1
  Top Layer w0.3: v1(69.5,117.676) 70.518,117.676 DA1.39 ; DA2.39 71.8,86.618 71.8,92.3 73.55,94.05 93.45,94.05 93.4,94 ; v1(88.1,94) 93.4,94 ; X2.22 100.24,95 98,95 97,94 93.4,94
  int2 w0.3: v1(69.5,117.676) 69.5,121.5 71.5,123.5 79.3,123.5 87.9,114.9 87.9,94.2 v1(88.1,94)
V1.8: C47.1 C48.1 DA2.18 DA2.20 DA2.23 | length 8.3
  Top Layer w0.2: C47.1@79.54,78.877 C47.1
  Top Layer w0.3: DA2.18 77.704,79.3 78.5,79.3 78.809,79.609 ; DA2.20 78.809,79.609 ; DA2.23 79.639,80.9 80.5,80.9 C48.1 C47.1 ; C47.1@79.54,78.877 78.809,79.609
V3.3: C9.1 C10.1 C11.1 C12.1 C19.1 C20.1 C33.1 C34.1 C35.1 C36.1 C43.1 C44.1 DA1.11 DA1.14 DA1.17 DA1.24 DA1.36 DA1.47 DA2.11 DA2.14 DA2.17 DA2.24 DA2.36 DA2.47 G1.4 R3.1 R4.2 R10.1 R12.1 R14.1 | length 183.8
  Top Layer w0.25: R14.1 v1@75.6,99.05
  Top Layer w0.3: v1(65.5,112.376) 67.7,112.376 68.275,111.801 C20.1 68.875,112.076 70.461,112.076 DA1.47 ; v1(65.8,82.4) 66.1,82.7 67.7,82.7 68.375,82.025 C36.1 68.975,82.3 70.461,82.3 DA2.47 ; v1(71.5,104.276) 72.675,104.276 C9.1 ; C33.1 73.925,73.525 ; v1(74.3,89) 74.3,87.925 C44.1 74.325,86.249 DA2.36@74.682,85.893 ; v1(74.3,103.976) 74.3,105.151 C19.1 74.325,106.861 DA1.11 ; v1(74.3,118.876) 74.3,117.701 C11.1 74.325,115.99 DA1.36 ; v1(74.4,73.1) 73.975,73.525 73.925,73.525 ; DA2.11@74.682,77.407 74.325,77.051 C35.1 74.325,73.925 73.925,73.525 ; DA2.14 76.775,77.4 78.442,77.4 78.669,77.627 78.6,77.696 v1(78.6,78.6) 78,78.6 77.8,78.8 77.496,78.8 DA2.17 ; DA1.14 76.875,107.076 78.245,107.076 C12.1 ; DA1.17 78.423,107.649 C12.1 ; DA2.24 80.016,82.777 80.923,82.777 80.923,82.923 v1(81.7,83.7) ; DA1.24 80.216,112.753 C10.1 81.5,113.53 v1(81.5,113.576) ; v1(79.3,107.976) 79.145,107.976 C12.1
  Top Layer w0.5: G1.4 60.9,100.7 62.1,101.9 63.8,101.9 65.4,103.5 70.724,103.5 v1(71.5,104.276) ; v1(64,118.3) R3.1@65.65,118.3 ; v1(74.3,103.976) v1(75.3,103.976) 75.3,101.425 R10.1 76.45,99.986 76.45,99.05 75.6,99.05 76.45,98.2 R4.2 ; v1(79.3,107.976) 82.45,104.826 R12.1
  int2 w0.5: v1(64,118.3) 66.524,118.3 70.124,114.7
  int2 w1: v1(65.8,82.4) 72.4,89 v1(74.3,89) 74.3,90 75.2,90.9 75.35,90.9 ; v1(71.5,104.276) 71.5,106.59 65.714,112.376 67.8,112.376 70.124,114.7 v1(74.3,118.876) 76.2,118.876 v1(81.5,113.576) 81.5,110.176 v1(79.3,107.976) v1(75.3,103.976) ; v1(74.4,73.1) 78.6,77.3 v1(78.6,78.6) 79,79 80.1,79 81.6,80.5 81.6,83.6 v1(81.7,83.7) 76.4,89 75.35,89 75.35,90.9 ; v1@75.35,98.9 75.35,90.9
  other v1: 75.45,98.9
pads on no net: DA1.5 DA1.6 DA1.16 DA2.5 DA2.6 DA2.16 DA3. G1.1

## Polygon pours and split planes (outlines as drawn)
GND on Top Layer "int2-No Net" (solid, remove dead copper, pour order 0): 26,124 112,124 112,66 26,66
GND on int2 "int2-No Net" (solid, remove dead copper, pour order 2): 26,124 112,124 112,66 26,66
GND on int1 "int2-No Net" (solid, remove dead copper, pour order 4): 26,124 112,124 112,66 26,66
GND on Bottom Layer "int2-No Net" (solid, remove dead copper, pour order 6): 26,124 112,124 112,66 26,66

## Silkscreen, mask and mechanical layers (free items; w line width, h text height)
Top Solder:
  lines w1.5: 91,69.9 55.1,69.9 55,70 55,120.7 92.9,120.7
Mechanical 1:
  lines w0.3: 25,65 25,125 113,125 113,65 25,65